# EAGLE board grizzly3 (EAGLE 7.7.0)
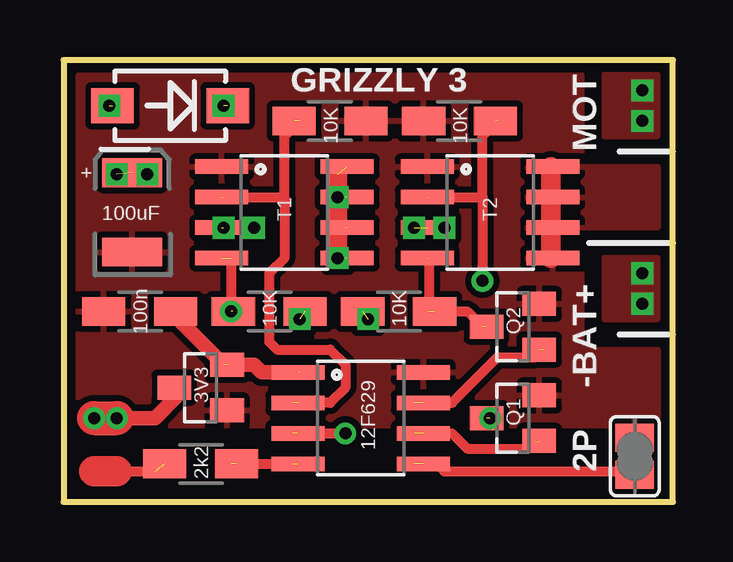
[diagram p0: board, top side]
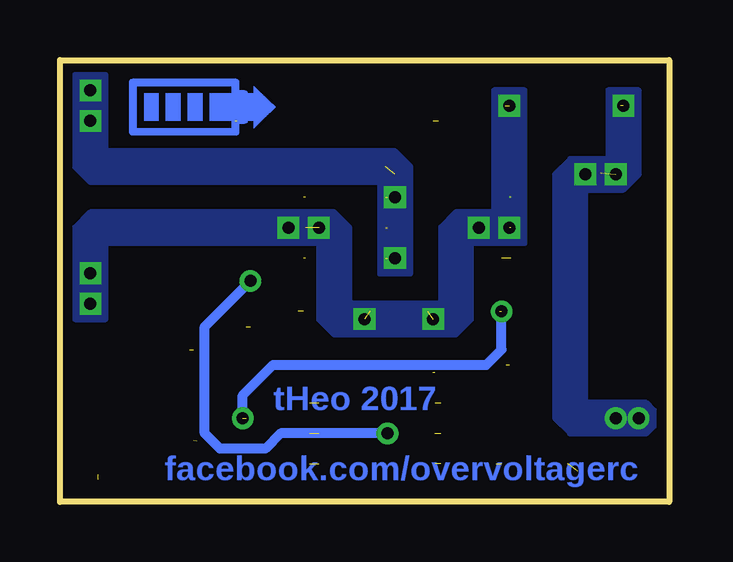
[diagram p1: board, bottom side, seen from below]

Size 25.4 x 18.41 mm. Coordinates in mm from the lower left corner, seen from the top.
Outline: 0,0 25.4,0 25.4,18.42 0,18.42 0,0
Copper layers (1*16): Top 0.035mm / dielectric 1.5mm / Bottom 0.035mm
Design rules "default *": minimum track width 10mil, minimum drill 24mil, track to track 10mil, track to pad 10mil, pad to pad 10mil, via to via 10mil, smd to smd 10mil, copper to edge 8mil, drill to drill 8mil, minimum pad ring 10mil, minimum via ring 8mil, stop-mask expansion 4mil, vias tented up to drill 20mil, thermal gap 10mil

## Footprints (pad centres in the part's own frame; a part is rotated, then mirrored left to right if it is on the bottom)
R1206W = smd 1.8 x 1.2: 1 -1.499,0; 2 1.499,0
SOT23 = smd 1 x 1.4: 1 -0.95,-1.1; 2 0.95,-1.1; 3 0,1.1
SMA-DIODE-KIT = smd 1.77 x 1.47: A -2.4,0; C 2.4,0
EIA3528 = smd 1.2 x 2.5: A 1.65,0; C -1.65,0
SJ = smd 1.168 x 1.6: 1 -0.762,0; 2 0.762,0
SO08 = smd 0.61 x 2.21: 1 -1.905,-2.616; 2 -0.635,-2.616; 3 0.635,-2.616; 4 1.905,-2.616; 5 1.905,2.616; 6 0.635,2.616; 7 -0.635,2.616; 8 -1.905,2.616

## Placement (x,y rotation side)
E$1  [R1206W]  5.71,1.59 180 top
E$2  [SOT23]  5.71,4.76 90 top
E$3  [R1206W]  3.17,7.94 180 top
E$4  [SMA-DIODE-KIT]  4.45,16.51 0 top
E$6  [R1206W]  16.51,15.88 0 top
E$7  [R1206W]  11.11,15.88 0 top
E$8  [R1206W]  8.57,7.94 180 top
E$9  [R1206W]  13.97,7.94 180 top
E$10  [EIA3528]  2.86,12.07 90 top
E$11  [SOT23]  18.73,7.3 90 top
E$12  [SOT23]  18.73,3.49 90 top
E$13  [SJ]  23.81,1.9 90 top
PIC  [SO08]  12.38,3.49 270 top
T1  [SO08]  9.21,12.07 270 top
T2  [SO08]  17.78,12.07 270 top

## Library data of the parts
E$1 E$3 E$6-E$9 = smd-ipc
E$2 E$11 E$12 = diode
E$4 = SparkFun-DiscreteSemi
E$10 = SparkFun-Capacitors
E$13 = jumper
PIC T1 T2 = SparkFun-DigitalIC

## Nets
3V3: E$2.2 E$3.1 PIC.1
BAT+: E$4.C E$8.1 E$9.2 T1.3 T2.3
BP1: E$12.1 PIC.6
BP2: E$11.1 PIC.7
GND: E$2.1 E$3.2 E$6.1 E$7.2 E$10.C E$11.2 E$12.2 E$13.2 PIC.8 T1.1 T2.1
JP: E$13.1 PIC.5
MOT1: T1.5 T1.6 T1.7 T1.8
MOT2: T2.5 T2.6 T2.7 T2.8
N1: E$7.1 PIC.2 T1.2
N2: E$6.2 PIC.3 T2.2
P1: E$8.2 E$12.3 T1.4
P2: E$9.1 E$11.3 T2.4
PPM: E$1.1 PIC.4
RX: E$1.2
VIN: E$4.A E$10.A

## Tracks (layer width: path | path; a pad name or v marks a point on that pad's centre or on a via)
3V3  (2 unrouted)
  Top 0.61: E$3.1 4.67,7.71 6.67,5.71 7.94,5.71 8.26,5.4 9.84,5.4
BAT+  (via drill 0.5)  (5 unrouted)
  Top 0.61: v7.94,11.43 v6.67,11.43
  other vias: 14.61,11.43 24.13,9.53 24.13,8.26 6.67,16.51 9.84,7.62 12.7,7.62 15.88,11.43
  pour Top: 22.54,10.16 22.54,7.62 24.77,7.62 24.77,10.16
  pour Bottom: 6.03,10.79 6.03,17.14 7.3,17.14 7.3,12.07 8.89,12.07 9.53,11.43 9.53,8.26 13.34,8.26 13.34,11.43 13.97,12.07 24.13,12.07 24.77,11.43 24.77,7.62 23.49,7.62 23.49,10.79 14.61,10.79 14.61,7.62 13.97,6.99 8.89,6.99 8.26,7.62 8.26,10.79
BP1  (2 unrouted)
  Top 0.406: 14.6,2.86 16.19,2.86 16.83,2.22 19.37,2.22 19.68,2.54
BP2  (2 unrouted)
  Top 0.406: 14.6,4.13 16.19,4.13 18.1,6.03 19.68,6.03 20,6.35
GND
  pour Top: 24.77,6.35 24.77,3.17 0.64,3.17 0.64,17.78 21.59,17.78 21.59,6.67 21.91,6.35
JP  (2 unrouted)
  Top 0.406: 14.6,1.59 15.56,1.59 15.87,1.27 23.49,1.27 23.81,0.95
MOT1  (via drill 0.5)  (4 unrouted)
  Top 0.406: 11.75,11.43 11.43,11.43 | 11.75,12.7 v11.43,12.7 | 11.75,10.16 v11.43,10.16
  Top 0.813: 11.43,13.65 v11.43,12.7 11.43,11.43 v11.43,10.16
  other vias: 24.13,17.14 24.13,15.88
  pour Top: 22.54,17.78 22.54,15.24 24.77,15.24 24.77,17.78
  pour Bottom: 10.79,13.97 11.43,14.61 23.49,14.61 23.49,17.78 24.77,17.78 24.77,13.97 24.13,13.34 12.07,13.34 12.07,9.53 10.79,9.53
MOT2
  Top 0.813: 20.32,13.97 20.32,10.16
  pour Top: 24.77,11.43 21.27,11.43 21.27,9.53 19.37,9.53 19.37,13.97 24.77,13.97
N1  (3 unrouted)
  Top 0.406: 6.67,12.7 9.21,12.7 | 9.21,12.7 9.21,15.24 9.84,15.87 | 9.21,12.7 9.21,10.16 8.57,9.52 8.57,6.67 8.89,6.35 11.11,6.35 11.75,5.71 11.75,4.76 11.11,4.13 9.52,4.13
N2  (via drill 0.5)  (3 unrouted)
  Top 0.406: 15.24,12.7 17.46,12.7 | 17.46,12.7 17.46,15.24 18.1,15.87 | 17.46,12.7 v17.46,9.21 | 9.52,2.86 v11.75,2.86
  Bottom 0.406: v11.75,2.86 16.19,2.86 16.83,2.22 18.73,2.22 19.37,2.86 19.37,7.3 v17.46,9.21
P1  (via drill 0.5)  (3 unrouted)
  Top 0.406: 6.99,10.16 v6.99,7.94
  Bottom 0.406: v17.78,3.49 17.78,4.45 16.51,5.71 7.62,5.71 6.99,6.35 v6.99,7.94
P2  (3 unrouted)
  Top 0.406: 15.24,10.16 15.24,7.94 16.83,7.94 17.46,7.3
PPM  (2 unrouted)
  Top 0.406: 6.99,1.59 9.52,1.59
RX  (1 unrouted)
  Top 0.406: 2.22,1.27 3.81,1.27
  Top 1.27: 1.27,1.27 2.22,1.27
VIN  (via drill 0.5)  (2 unrouted)
  Top 0.61: 4.76,4.76 4.76,4.45 3.81,3.49 v2.22,3.49
  Top 1.422: v1.27,3.49 v2.22,3.49
  other vias: 1.9,16.51 2.22,13.65 3.49,13.65
  pour Bottom: 4.13,2.86 0.95,2.86 0.64,3.17 0.64,3.81 0.95,4.13 3.49,4.13 3.49,13.02 1.9,13.02 1.27,13.65 1.27,17.14 2.54,17.14 2.54,14.29 4.13,14.29 4.76,13.65 4.76,3.49
(copper drawn outside any net)
  shapes: Bottom area x1683

## Text on the board
Bottom: tHeo 2017 | facebook.com/overvoltagerc
tPlace: GRIZZLY 3 | 10K | 10K | + | MOT | T1 | T2 | 100uF | 100n | 10K | 10K | Q2 | 12F629 | 3V3 | -BAT+ | Q1 | 2k2 | 2P